# EAGLE board schematic_var1 (EAGLE 6.4)
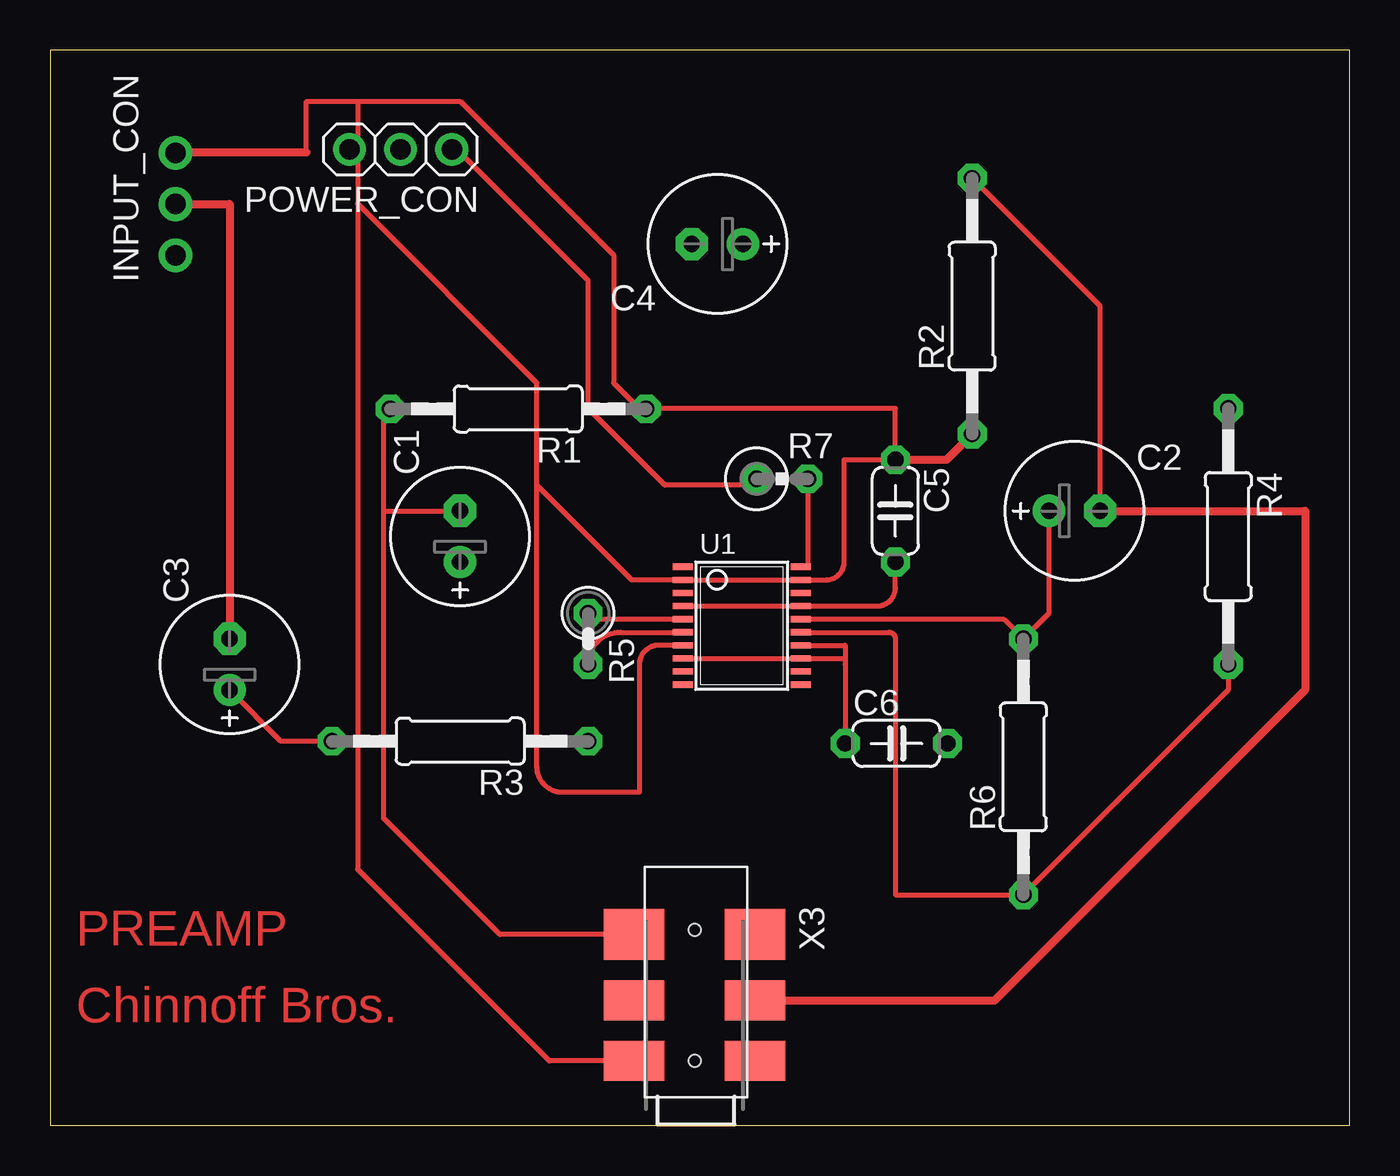
[diagram p0: board, top side]
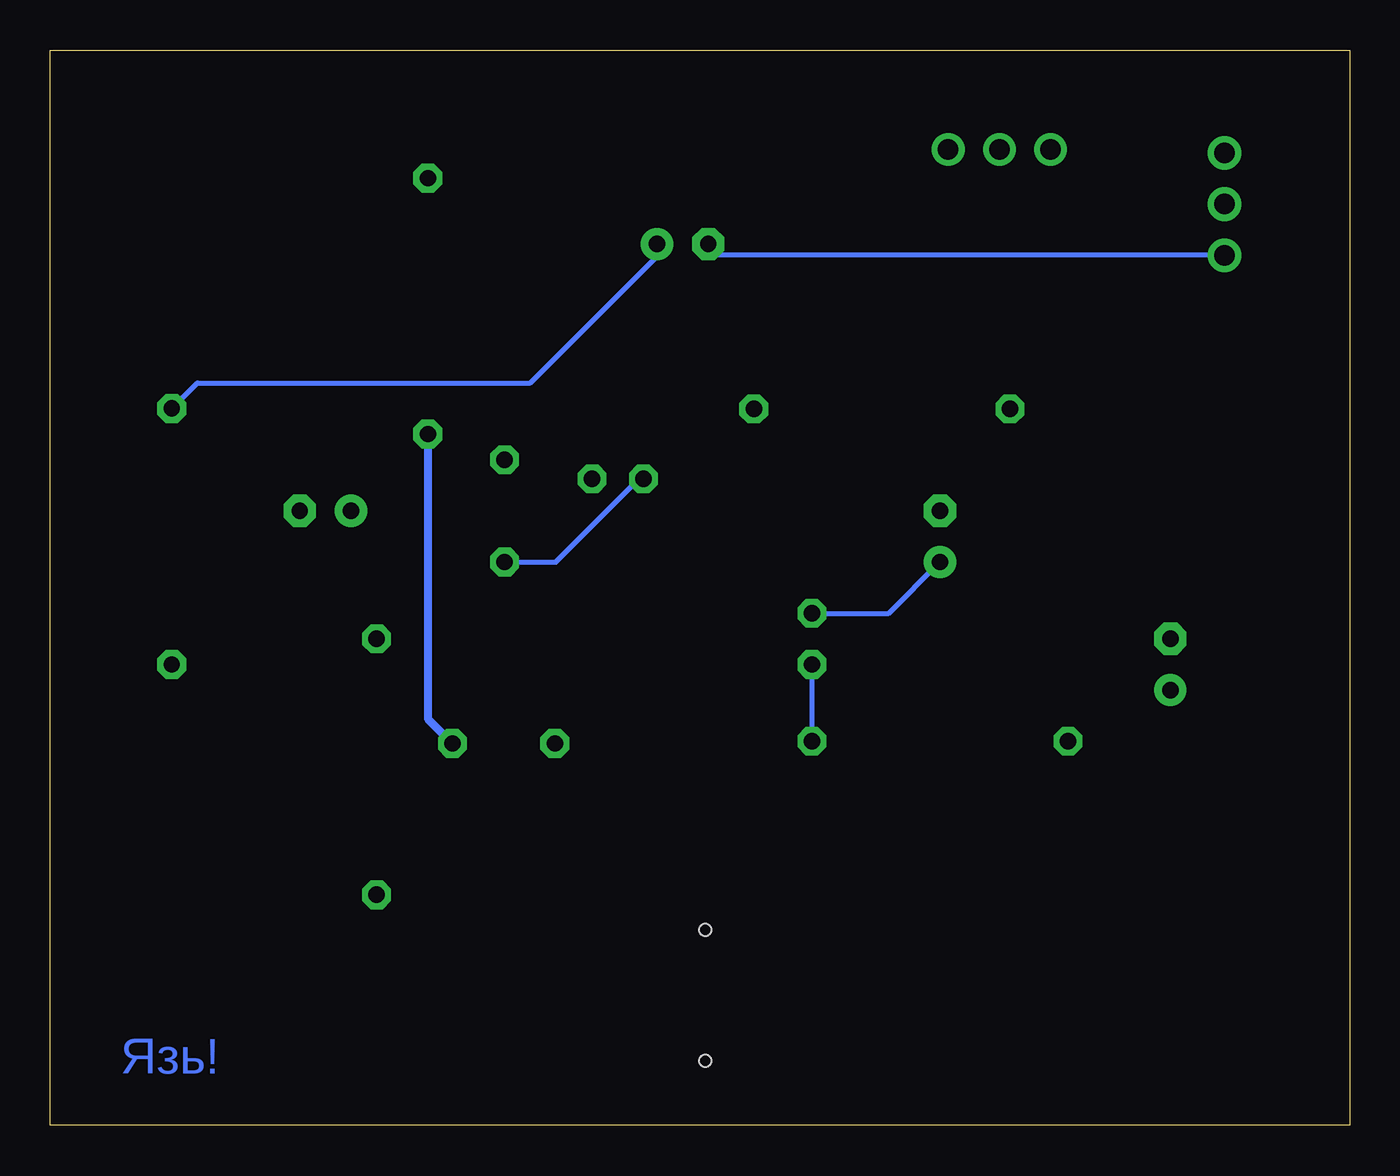
[diagram p1: board, bottom side, seen from below]

Size 64.44 x 53.33 mm. Coordinates in mm from the lower left corner, seen from the top.
Outline: 0,0 64.44,0 64.44,53.33 0,53.33 0,0
Copper layers (1*16): Top 0.035mm / dielectric 1.5mm / Bottom 0.035mm
Design rules "default": minimum track width 10mil, minimum drill 32mil, track to track 12mil, track to pad 12mil, pad to pad 12mil, via to via 12mil, smd to smd 8mil, copper to edge 40mil, drill to drill 40mil, minimum pad ring 12mil, minimum via ring 12mil, stop-mask expansion 4mil, vias tented up to drill 0mil, thermal gap 20mil

## Footprints (pad centres in the part's own frame; a part is rotated, then mirrored left to right if it is on the bottom)
E2,5-7 = drill 0.813 pad 1.6: + -1.27,0 | drill 0.813 pad 1.6 octagon: - 1.27,0
C050-024X044 = drill 0.813 octagon: 1 -2.54,0; 2 2.54,0
1X03-CLEANBIG = drill 1.016 pad 1.676: 1 -2.54,0; 2 0,0; 3 2.54,0
1X03 = drill 1.016: 1 -2.54,0; 2 0,0; 3 2.54,0
0207/12 = drill 0.813 octagon: 1 -6.35,0; 2 6.35,0
0207/2V = drill 0.813 octagon: 1 -1.27,0; 2 1.27,0
0309V = drill 0.813 octagon: 1 -1.27,0; 2 1.27,0
TSSOP20 = smd 0.305 x 0.991: +IN_A 1.625,-2.918; +IN_B 1.625,2.918; +OUT_A -1.625,-2.918; +OUT_B -1.625,2.918; -IN_A 0.325,-2.918; -IN_B 0.325,2.918; -OUT_A -0.325,-2.918; -OUT_B -0.325,2.918; BYPASS 0.975,2.918; GND -2.275,-2.918; GND2 0.975,-2.918; GND3 -2.275,2.918; HP_IN -2.925,2.918; NC1 2.275,-2.918; NC2 2.925,-2.918; NC3 2.275,2.918; NC4 2.925,2.918; SHUTDOWN -2.925,-2.918; VDD -0.975,-2.918; VDD2 -0.975,2.918
1501_03 = smd 3 x 2: 1 3,0; 2 3,-3; 11 -3,0; 22 -3,-3 | smd 3 x 2.54: 3 3,-6.27; 33 -3,-6.27 | hole 0.6: 0,0; 0,-6.5

## Placement (x,y rotation side)
C1  [E2,5-7]  20.32,29.21 90 top
C2  [E2,5-7]  50.8,30.48 0 top
C3  [E2,5-7]  8.89,22.86 90 top
C4  [E2,5-7]  33.08,43.72 180 top
C5  [C050-024X044]  41.91,30.48 270 top
C6  [C050-024X044]  41.96,18.94 0 top
INPUT_CON  [1X03-CLEANBIG]  6.2,45.7 90 top
POWER_CON  [1X03]  17.37,48.41 180 top
R1  [0207/12]  23.2,35.54 180 top
R2  [0207/12]  45.72,40.64 90 top
R3  [0207/12]  20.32,19.05 180 top
R4  [0207/12]  58.42,29.21 270 top
R5  [0207/2V]  26.67,24.13 270 top
R6  [0207/12]  48.26,17.78 90 top
R7  [0309V]  36.3,32.07 0 top
U1  LM4863  [TSSOP20]  34.29,24.78 270 top
X3  1501_03  [1501_03]  31.95,3.19 180 top

## Library data of the parts
C1-C4 = rcl
C5 C6 R1-R7 = resistor
INPUT_CON POWER_CON = adafruit
U1 = mylib
X3 = mylib; OC_FARNELL: 1200127; OC_NEWARK: unknown

## Nets
+5V: C5.2 POWER_CON.1 R7.1 U1.VDD U1.VDD2
GND: C5.1 C6.2 INPUT_CON.3 POWER_CON.3 R1.1 R2.1 U1.GND U1.GND2 U1.GND3 X3.1
INPUT_LEFT: C3.- INPUT_CON.2
INPUT_RIGHT: C4.- INPUT_CON.1
N$1: C2.+ R6.2 U1.-OUT_B
N$2: C1.+ R5.1 U1.-OUT_A
N$3: C3.+ R3.2
N$4: R3.1 R5.2 U1.-IN_A
N$5: R4.2 R6.1 U1.-IN_B
N$6: C4.+ R4.1
N$7: C6.1 U1.+IN_A U1.+IN_B U1.BYPASS
N$8: R7.2 U1.HP_IN
OUT_LEFT: C1.- R1.2 X3.3
OUT_RIGHT: C2.- R2.2 X3.22

## Tracks (layer width: path | path; a pad name or v marks a point on that pad's centre or on a via)
+5V
  Top 0.254: POWER_CON.1 20.32,48.26 26.67,41.91 26.67,35.56 30.48,31.75 35.56,31.75 R7.1 | C5.2 41.91,26.67 arc-90 40.99,25.76 U1.VDD2 U1.VDD
  Bottom 0.254: C5.2 39.37,27.94 35.56,31.75 R7.1
GND
  Top 0.254: 44.45,19.05 C6.2 | 29.21,35.56 41.91,35.56 C5.1 39.37,33.02 39.37,27.94 arc-90 38.48,27.05 U1.GND3 U1.GND 28.82,27.05 24.13,31.75 | 15.24,50.8 15.24,48.41 | 15.24,48.41 15.24,45.72 | 15.24,45.72 15.24,12.7 24.75,3.19 X3.1 | 29.21,35.56 27.94,36.83 27.94,43.18 20.32,50.8 15.24,50.8 | 29.21,35.56 R1.1 | U1.GND2 30.16,23.8 arc90 29.21,22.86 29.21,16.51 25.4,16.51 arc-90 24.13,17.78 24.13,31.75 | 12.7,48.26 12.7,50.8 15.24,50.8 | POWER_CON.3 15.24,48.41 | 24.13,31.75 24.13,36.83 15.24,45.72
  Top 0.406: C5.1 44.45,33.02 R2.1 | 12.7,48.26 6.2,48.26 INPUT_CON.3
  Bottom 0.406: R2.1 45.72,20.16 C6.2
INPUT_LEFT
  Top 0.406: INPUT_CON.2 8.89,45.7 | 8.89,45.7 8.89,45.72 | 8.89,45.7 C3.-
INPUT_RIGHT
  Bottom 0.254: C4.- 31.75,43.18 6.35,43.18 INPUT_CON.1
N$1
  Top 0.254: C2.+ 49.53,25.4 R6.2 47.28,25.11 U1.-OUT_B
N$2
  Top 0.254: R5.1 arc90 26.96,25.11 U1.-OUT_A
  Bottom 0.254: C1.+ 22.86,25.4 R5.1
N$3
  Top 0.254: C3.+ 11.43,19.05 R3.2
N$4
  Top 0.254: R5.2 arc-90 28.27,24.45 U1.-IN_A
  Bottom 0.254: R5.2 R3.1
N$5
  Top 0.254: R4.2 58.42,21.59 R6.1 41.91,11.43 41.91,24.13 arc90 41.59,24.45 U1.-IN_B
N$6
  Bottom 0.254: R4.1 57.15,36.83 40.64,36.83 34.29,43.18 C4.+
N$7
  Top 0.254: U1.+IN_A U1.+IN_B 39.42,23.16 | U1.BYPASS 39.42,23.8 39.42,23.16 | C6.1 39.42,22.86 39.42,23.16
N$8
  Top 0.254: R7.2 37.57,27.7 U1.HP_IN
OUT_LEFT
  Top 0.254: 16.51,30.48 16.51,35.56 R1.2 | 16.51,30.48 16.51,15.24 22.29,9.46 X3.3 | 16.51,30.48 C1.-
OUT_RIGHT
  Top 0.254: R2.2 52.07,40.64 C2.-
  Top 0.406: C2.- 62.23,30.48 62.23,21.59 46.83,6.19 X3.22

## Text on the board
Top: PREAMP | Chinnoff Bros.
Bottom: Язь!